# Altium PCB PCB1.PcbDoc
Units mm, origin at the board's own origin, x right, y up, seen from the top; angles counter-clockwise.
Board outline 22 x 17 mm, 2 copper layers (Top Layer, Bottom Layer); 10 components, 7 nets, 25 pads, 7 vias.
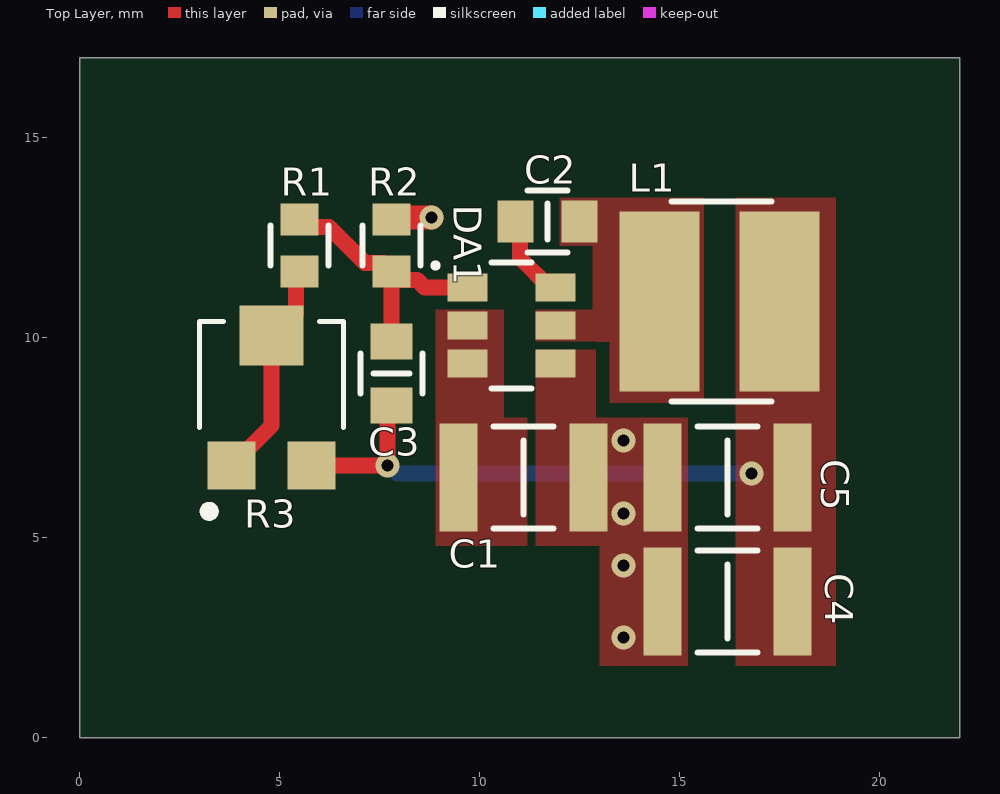
[diagram p0: Top Layer view]
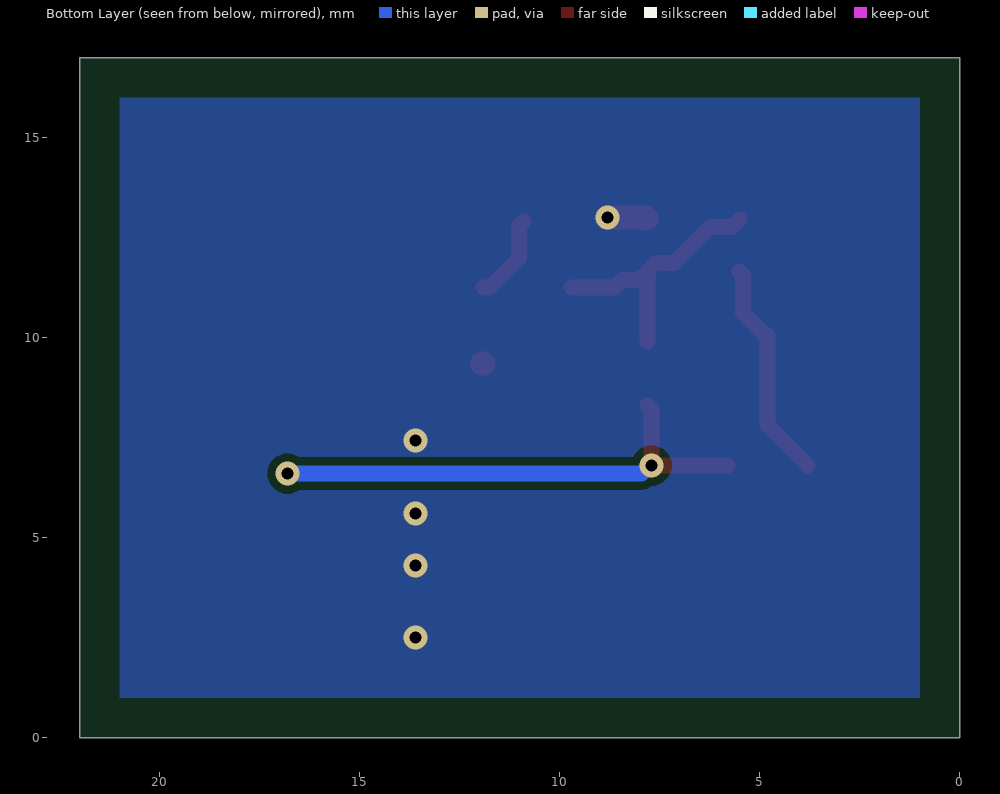
[diagram p1: Bottom Layer view, seen from below]
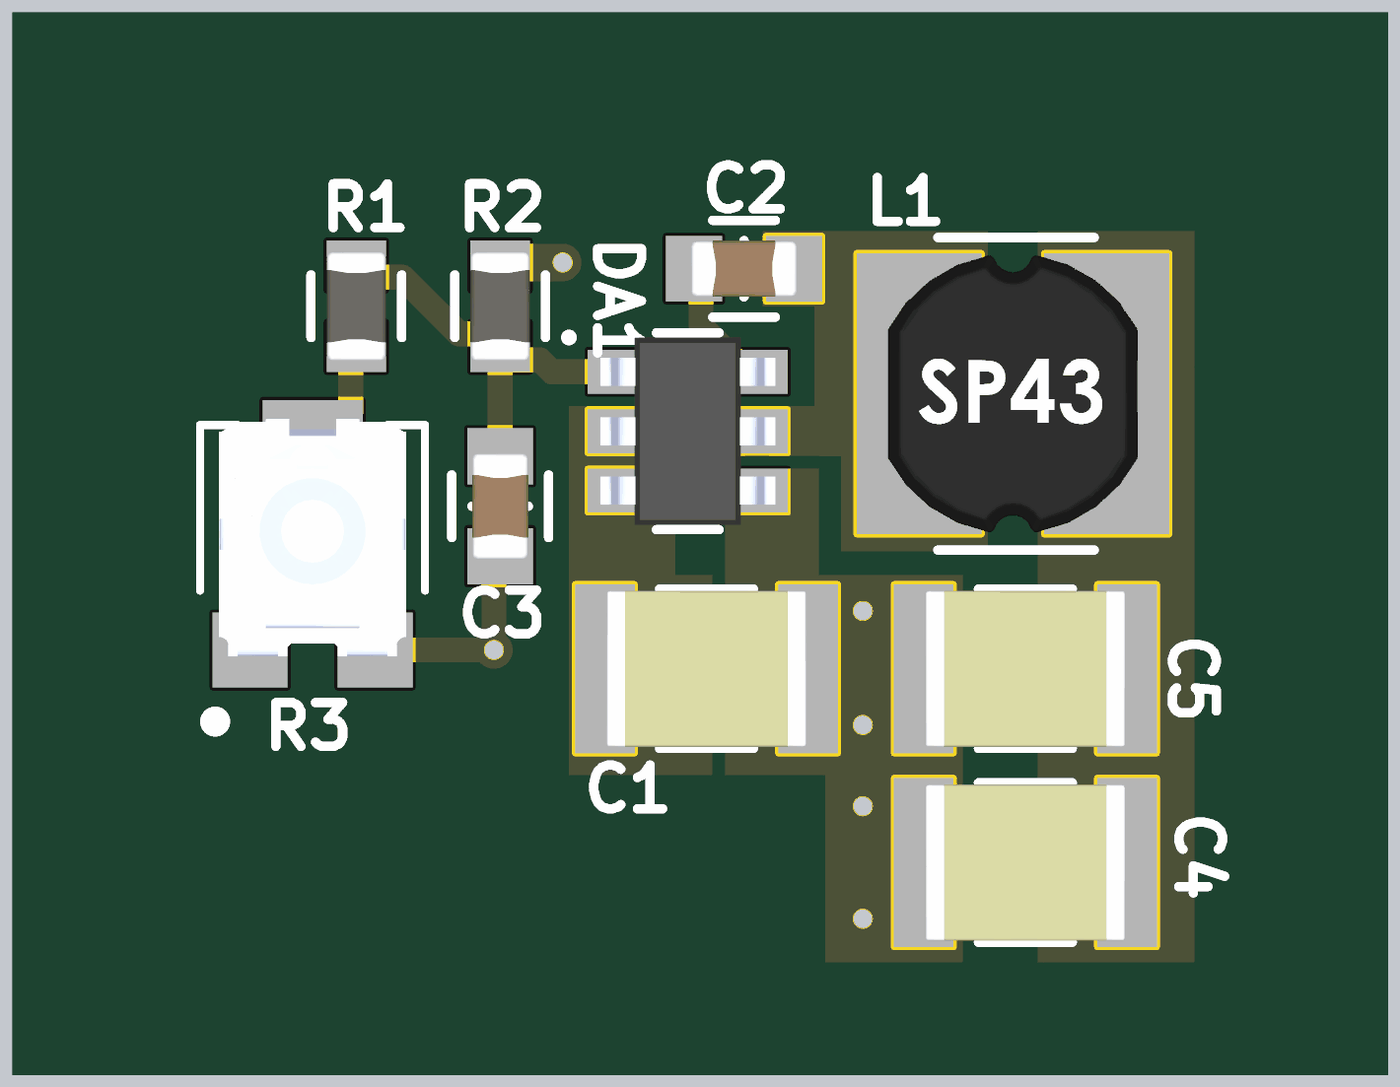
[diagram p2: 3D render of the assembled board from above, using the file's embedded part models]

## Layer stack, top to bottom
Top Solder: solder mask 0.0102, Solder Resist, Dk 3.5
Top Layer: signal copper 0.0356
Dielectric 1: dielectric 0.32, FR-4, Dk 4.8
Bottom Layer: signal copper 0.0356
Bottom Solder: solder mask 0.0102, Solder Resist, Dk 3.5

## Board outline
0,0 0,17 22,17 22,0

## Design rules (kind name [scope] priority, off if disabled: settings)
AcuteAngle [All] p1: minimum=3.50000000000000E+0001 checktracksonly=FALSE
BoardOutlineClearance "BoardOutlineClearance 1" [All] p1: gap=0.25 ignorepadtopadclearanceinfootprint=FALSE except(0: Arc-SplitContinuation Track-SplitContinuation SMDPad-SplitContinuation THPad-SplitContinuation Via-SplitContinuation Fill-SplitContinuation Poly-SplitContinuation Region-SplitContinuation Text-SplitContinuation) // Milling
BoardOutlineClearance "BoardOutlineClearance 2" [All] p2: gap=0.4 ignorepadtopadclearanceinfootprint=FALSE except(0: Arc-SplitContinuation Track-SplitContinuation SMDPad-SplitContinuation THPad-SplitContinuation Via-SplitContinuation Fill-SplitContinuation Poly-SplitContinuation Region-SplitContinuation Text-SplitContinuation) // V-Cut
Clearance "Clearance-1 1/2 Oz" [All] p1: gap=0.125 ignorepadtopadclearanceinfootprint=FALSE except(0.2: Arc-Fill Arc-Poly Track-Fill Track-Poly SMDPad-SMDPad SMDPad-Fill SMDPad-Poly THPad-Fill THPad-Poly Via-Fill Via-Poly Fill-Fill Fill-Poly Poly-Poly Poly-Region Poly-Text; 0.25: Arc-Hole Track-Hole SMDPad-Hole THPad-Hole Via-Hole Fill-Hole Poly-Hole Region-Hole Text-Hole) // Standart
Clearance "Clearance-2 1/2 Oz" [All] p2: gap=0.1 ignorepadtopadclearanceinfootprint=FALSE except(0.15: Arc-Fill Arc-Poly Track-Fill Track-Poly SMDPad-SMDPad SMDPad-Fill SMDPad-Poly THPad-Fill THPad-Poly Via-Fill Via-Poly Fill-Fill Fill-Poly Poly-Poly Poly-Region Poly-Text; 0.25: Arc-Hole Track-Hole SMDPad-Hole THPad-Hole Via-Hole Fill-Hole Poly-Hole Region-Hole Text-Hole) // Advance
DiffPairsRouting DiffPairsRouting_PCIe [InDifferentialPairClass('PCIe')] p1: maxlimit=0.101 minlimit=0.101 mostfreqgap=0.101 toplayer_minwidth=0.1 toplayer_maxwidth=0.1 toplayer_prefwidth=0.1 bottomlayer_minwidth=0.1 bottomlayer_maxwidth=0.1 bottomlayer_prefwidth=0.1 impedanceprofiledriven=TRUE impedanceprofileid={E27F7E04-DA22-4BD8-B395-67B9CAAEB593} maxuncoupledlength=12.7
DiffPairsRouting DiffPairsRouting_USB [InDifferentialPairClass('USB3.0')] p2: maxlimit=0.127 minlimit=0.127 mostfreqgap=0.127 toplayer_minwidth=0.18 toplayer_maxwidth=0.18 toplayer_prefwidth=0.18 bottomlayer_minwidth=0.18 bottomlayer_maxwidth=0.18 bottomlayer_prefwidth=0.18 impedanceprofiledriven=TRUE impedanceprofileid={974B2C30-D13C-404B-80F3-30DCBE79ECB5} maxuncoupledlength=12.7
DiffPairsRouting "DiffPairsRouting 1/2 Oz" [All] p3 off: maxlimit=0.254 minlimit=0.1 mostfreqgap=0.254 toplayer_minwidth=0.1 toplayer_maxwidth=0.381 toplayer_prefwidth=0.381 bottomlayer_minwidth=0.1 bottomlayer_maxwidth=0.381 bottomlayer_prefwidth=0.381 maxuncoupledlength=12.7
HoleSize "Minimum HoleSize" [IsPad] p1: absolutevalues=TRUE maxlimit=5.9 minlimit=0.6 maxpercent=80.000 minpercent=20.000
HoleSize "Minimum HoleSize VIA 1" [IsVia] p2: absolutevalues=TRUE maxlimit=5.9 minlimit=0.3 maxpercent=80.000 minpercent=20.000 // Standart
HoleSize "Minimum HoleSize VIA 2" [IsVia] p3: absolutevalues=TRUE maxlimit=5.9 minlimit=0.2 maxpercent=80.000 minpercent=20.000 // Advance
HoleToHoleClearance Hole2HoleClearance [All] p1: gap=0.25 allowstackedmicrovias=FALSE
Length [InNetClass('USB3.0')] p1: maxlimit=65 minlimit=0
MatchedLengths [All] p1: tolerance=0.05 checknetsindiffpair=TRUE checkdiffpairvsdiffpair=FALSE checkxsignals=FALSE checkothers=FALSE
MinimumAnnularRing "Minimum AR VIA Standart" [All] p1: minimumring=0.15
MinimumAnnularRing "Minimum AR PAD Standart" [All] p2: minimumring=0.2
MinimumAnnularRing "Minimum AR VIA Advance" [All] p3: minimumring=0.1
MinimumAnnularRing "Minimum AR PAD Advance" [All] p4: minimumring=0.15
MinimumSolderMaskSliver "SolderMask Bridge Standart" [All] p1: minsoldermaskwidth=0.15 // All Masks
MinimumSolderMaskSliver "SolderMask Bridge Advance" [All] p2: minsoldermaskwidth=0.1 // Mask LDI
PlaneClearance "PlaneClearance-1 1/2 Oz" [All] p1: clearance=0.2 // Standart
PlaneClearance "PlaneClearance-2 1/2 Oz" [All] p2: clearance=0.15 // Advance
PlaneConnect "TermalConnect-1 1/2 Oz" [All] p1: planeconnectstyle=Relief reliefexpansion=0.2 reliefentries=4 reliefconductorwidth=0.2 reliefairgap=0.2 // Standart
PlaneConnect "TermalConnect-2 1/2 Oz" [All] p2: pad.planeconnectstyle=Relief pad.reliefexpansion=0.15 pad.reliefentries=4 pad.reliefconductorwidth=0.15 pad.reliefairgap=0.15 via.planeconnectstyle=Direct via.reliefexpansion=0.15 via.reliefentries=4 via.reliefconductorwidth=0.15 via.reliefairgap=0.15 // Advance
PolygonConnect PolygonConnect_main [All] p1: connectstyle=Direct reliefconductorwidth=0.254 reliefentries=4 polygonreliefangle="90 Angle" airgapwidth=0.254
PolygonConnect "PolygonConnect-1 1/2 Oz" [All] p2: thpad.connectstyle=Relief thpad.reliefconductorwidth=0.15 thpad.reliefentries=4 thpad.polygonreliefangle="90 Angle" thpad.airgapwidth=0.2 smdpad.connectstyle=Relief smdpad.reliefconductorwidth=0.2 smdpad.reliefentries=4 smdpad.polygonreliefangle="90 Angle" smdpad.airgapwidth=0.2 via.connectstyle=Direct via.reliefconductorwidth=0.254 via.reliefentries=4 via.polygonreliefangle="90 Angle" via.airgapwidth=0.254 // Standart
PolygonConnect "PolygonConnect-2 1/2 Oz" [All] p3: thpad.connectstyle=Relief thpad.reliefconductorwidth=0.125 thpad.reliefentries=4 thpad.polygonreliefangle="90 Angle" thpad.airgapwidth=0.15 smdpad.connectstyle=Relief smdpad.reliefconductorwidth=0.125 smdpad.reliefentries=4 smdpad.polygonreliefangle="90 Angle" smdpad.airgapwidth=0.15 via.connectstyle=Direct via.reliefconductorwidth=0.254 via.reliefentries=4 via.polygonreliefangle="90 Angle" via.airgapwidth=0.254 // Advance
RoutingCorners [All] p1 off: cornerstyle=45-Degree minsetback=2.54 maxsetback=2.54
RoutingVias [All] p1: holewidth=0.3 width=0.6 viastyle="Through Hole" minholewidth=0.2 minwidth=0.4 maxholewidth=5.9 maxwidth=6.4
SilkToSilkClearance Silk2SilkClearance [All] p1 off: silktosilkclearance=0.15
SilkToSolderMaskClearance Silk2SolderMaskClearance [IsPad] p1 off: minsilkscreentomaskgap=0.15 clearancetoexposedcopper=TRUE
SolderMaskExpansion SolderMaskExpansion_vias [IsVia] p1: expansion=0.102 istentingtop=TRUE
SolderMaskExpansion SolderMaskExpansion-1 [All] p2: expansion=0.05 istentingtop=FALSE // Standart
SolderMaskExpansion "SolderMaskExpansion LDI" [All] p3: expansion=0.025 istentingtop=FALSE // Advance
UnRoutedNet [All] p1: checkbadconnections=TRUE
Width "Width 1/2 Oz" [All] p1: maxlimit=10 minlimit=0.1 preferedwidth=0.125 checkconnectedcopper=TRUE
20 further rules are at their usual default settings.

## Components (designator, comment, footprint, x,y, rotation, side; value= is the part's Value field where it differs from the comment)
C1 "Capacitor" 1210C 11.1,6.5 r180 top value="10 мк"
C2 "Capacitor" 0603C 11.7,12.9 r0 top value="0,1 мк"
C3 "Capacitor" 0603C 7.8,9.1 r270 top value="100 п"
C4 "Capacitor" 1210C 16.2,3.4 r0 top value="22 мк"
C5 "Capacitor" 1210C 16.2,6.5 r0 top value="22 мк"
DA1 "AP63200" TSOT26 10.8,10.3 r270 top
L1 "SP43-150K" SP43 16,10.9 r0 top value="15 мк"
R1 "Resistor" 0603R 5.5,12.3 r270 top value="18 к"
R2 "Resistor" 0603R 7.8,12.3 r270 top value="3,9 к"
R3 "TC33X-2-503E" 3mm_trim 4.8,8.6 r90 top value="50 к"

## Footprints (in the part's own frame and the unit in brackets; to place one, negate y for a bottom-side part, rotate by r counter-clockwise, add the part's x,y. Pads: shape width x height; smd on the part's side, far side on the other; paste and mask are expansions set on the pad)
3mm_trim [mm]
  rect 1.2x1.2 smd: 1(-1.8,1) 3(-1.8,-1)
  rect 1.5x1.6 smd: 2(1.45,0)
  silkscreen extent -3.07,-1.8 1.8,1.8, body extent -1.9,-1.5 1.9,1.5, height 1.19
0603C [mm] "Chip Resistor, 2-Leads, Body 1,40x0,80mm, IPC Medium Density"
  rect 0.9x1.05 smd: 1(-0.8,0) 2(0.8,0)
  silkscreen extent -0.5,-0.77 0.5,0.77, body extent -0.85,-0.45 0.85,0.45, height 0.9
0603R [mm] "Chip Resistor, 2-Leads, Body 1.60x0.85mm, IPC Medium Density"
  rect 0.8x0.95 smd: 1(-0.65,0) 2(0.65,0)
  silkscreen extent -0.5,-0.72 0.5,0.72, body extent -0.87,-0.47 0.88,0.48, height 0.9
1210C [mm]
  rect 0.954x2.706 smd paste+0: 1(-1.625,0) 2(1.625,0)
  silkscreen extent -0.75,-1.28 0.75,1.28, body extent -2.35,-1.6 2.35,1.6, height 0.25
SP43 [mm]
  rect 2x4.5 smd: 1(-1.5,0) 2(1.5,0)
  silkscreen extent -1.2,-2.5 1.3,2.5, body extent -2,-2.22 2,2.22, height 3.19
TSOT26 [mm]
  rect 0.7x1 smd: 1(-0.95,-1.1) 2(0,-1.1) 3(0.95,-1.1) 4(0.95,1.1) 5(0,1.1) 6(-0.95,1.1)
  silkscreen extent -1.58,-1.95 1.57,0.5, body extent -1.5,-1.4 1.5,1.4, height 1.01

## Part data
C1: library part Capacitor_10u_10_35V_X7R_1210C, "Конденсатор", Capacity (nF)=10000, Dielectric=X7R, Tolerance=0,1, Voltage (V)=35, Library Path2=Schematic\Capacitor.SchLib, Part Number=Capacitor_10u_10_35V_X7R_1210C
C2: library part Capacitor_0,1u_10_50V_X7R_0603C, "Конденсатор", Capacity (nF)=100, Dielectric=X7R, Tolerance=0,1, Voltage (V)=50, Library Path2=Schematic\Capacitor.SchLib, Part Number=Capacitor_0,1u_10_50V_X7R_0603C
C3: library part Capacitor_100p_10_50V_X7R_0603C, "Конденсатор", Capacity (nF)=0,1, Dielectric=X7R, Voltage (V)=50, Library Path2=Schematic\Capacitor.SchLib, Part Number=Capacitor_100p_10_50V_X7R_0603C, Tolerance=0,1
C4 C5: library part Capacitor_22u_10_25V_X7R_1210C, "Конденсатор", Capacity (nF)=22000, Dielectric=X7R, Tolerance=0,1, Voltage (V)=25, Library Path2=Schematic\Capacitor.SchLib, Part Number=Capacitor_22u_10_25V_X7R_1210C
DA1: "DC-DC понижающий преобразователь, Vin: 3.8 - 40 В, adj, 2 А", Part Number=AP63200
L1: "Индуктивность на 15 мкГн, номинальный ток 1,3 А", Current (A)=1,3, Inductance (μH)=15, Part Number=SP43-150K
R1: library part Resistor_18k_1_0603, "Резистор номиналом 18 кОм и точностью 1%", Tolerance=1%, Part Number=Resistor_18k_1_0603
R2: library part Resistor_3.9k_1_0603, "Резистор номиналом 3,9 кОм и точностью 1%", Tolerance=1%, Part Number=Resistor_3.9k_1_0603
R3: "Потенциометр однооборотный керметный 50кОм 0.1Вт ±25% SMD лента на катушке", Tolerance=50%, Part Number=TC33X-2-503E

## Via types
v1: diameter 0.6, hole 0.3, Top Layer to Bottom Layer, tented both sides, 7 vias

## Nets (pads, with @x,y where several pads share a name; then routed paths per layer and width w, separated by ;. In a path a pad name is that pad's centre, name@x,y a point inside that pad or via, vN(x,y) a via of type N, cw(c..) or ccw(c..) an arc to the next point about the centre after c; other vN are vias at no path point)
BST: C2.1 DA1.6 | length 2.2
  Top Layer w0.4: C2.1 11.012,12.788 11.012,11.988 11.75,11.25 DA1.6
FB: C3.1 DA1.1 R1.1 R2.2 | length 6.7
  Top Layer w0.4: R1.1 5.686,12.764 6.236,12.764 7.14,11.86 7.59,11.86 R2.2 ; C3.1 R2.2 ; DA1.1 8.628,11.25 8.438,11.441 8.01,11.441 R2.2
GND: C1.1 C4.1 C5.1 DA1.4 R2.1 | length 1.1
  Top Layer w0.381: R2.1 R2.1@7.825,12.975
  Top Layer w0.6: R2.1@7.825,12.975 7.85,13 v1(8.8,13) ; DA1.4 DA1.4@11.94,9.35
  other v1: 13.6,2.5 13.6,4.3 13.6,5.6 13.6,7.425
NetR1_2: R1.2 R3.1 R3.2 | length 5.6
  Top Layer w0.4: R3.1 4.8,7.8 R3.2 4.85,10.05 5.41,10.61 5.41,11.56 R1.2
SW: C2.2 DA1.5 L1.1
Vin: C1.2 DA1.2 DA1.3
Vout: C3.2 C4.2 C5.2 L1.2 R3.3 | length 12.6
  Top Layer w0.4: R3.3 v1(7.7,6.8) 7.7,8.2 C3.2
  Bottom Layer w0.4: v1(7.7,6.8) 7.754,6.8 7.954,6.6 v1(16.8,6.6)

## Polygon pours and split planes (outlines as drawn)
GND on Top Layer "GND_L01_P001" (solid, pour order 1): 11.4,4.8 13,4.8 13,1.8 15.2,1.8 15.2,8 12.9,8 12.9,9.7 11.4,9.7
Vin on Top Layer "VIN_L01_P003" (solid, pour order 3): 8.9,10.7 8.9,4.8 11.2,4.8 11.2,8 10.6,8 10.6,10.7
SW on Top Layer "SW_L01_P005" (solid, pour order 5): 13.25,9.9 13.25,8.375 15.6,8.375 15.6,13.5 12,13.5 12,12.3 12.825,12.3 12.825,10.7 11.4,10.7 11.4,9.9
Vout on Top Layer "VOUT_L01_P002" (solid, pour order 2): 16.4,13.5 16.4,1.8 18.9,1.8 18.9,13.5
GND on Bottom Layer "GND_L02_P000" (solid, pour order 0): 1,16 21,16 21,1 1,1

## Silkscreen, mask and mechanical layers (free items; w line width, h text height)
Mechanical 5:
  the board outline again, w0.254